# EAGLE board Module-WiFi-M0-v0.2-Board-2 (EAGLE 7.5.0)
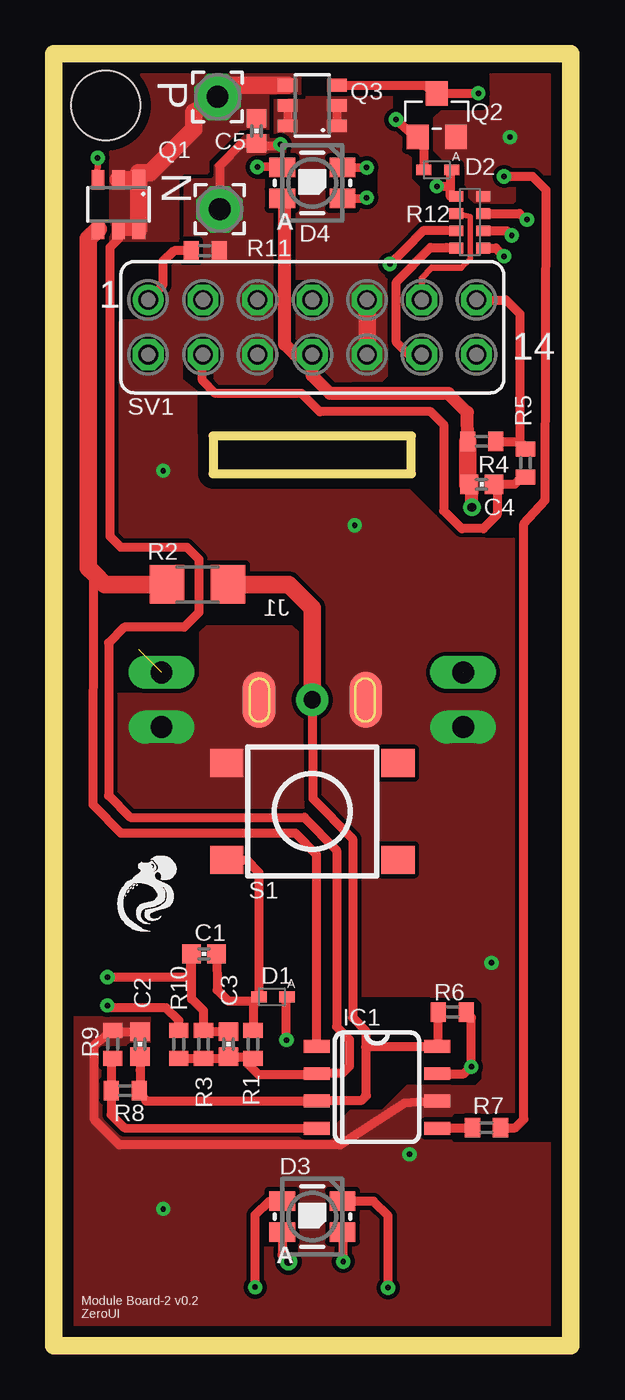
[diagram p0: board, top side]
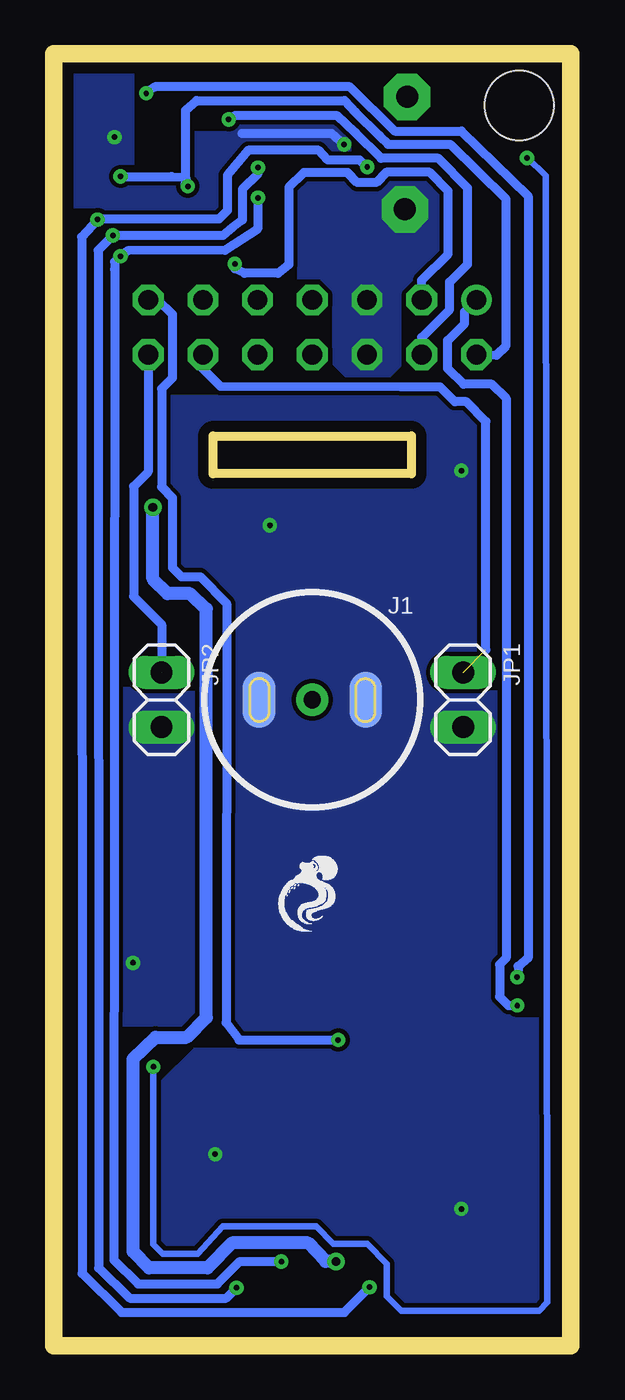
[diagram p1: board, bottom side, seen from below]

Size 24 x 60 mm. Coordinates in mm from the lower left corner, seen from the top.
Outline: 0,60 0,0 24,0 24,60 0,60
Outline: 7.4,42.25 7.4,40.5 16.6,40.5 16.6,42.25 7.4,42.25
Copper layers (1*16): Top 0.035mm / dielectric 1.5mm / Bottom 0.035mm
Design rules "default *": minimum track width 8mil, minimum drill 5mil, track to track 8mil, track to pad 8mil, pad to pad 8mil, via to via 8mil, smd to smd 8mil, copper to edge 20mil, drill to drill 8mil, minimum pad ring 10mil, minimum via ring 8mil, stop-mask expansion 4mil, vias tented up to drill 0mil, thermal gap 10mil
Holes 3.2 mm at 2.4,57.6
tRestrict: 78 lines
bRestrict: 26 lines

## Footprints (pad centres in the part's own frame; a part is rotated, then mirrored left to right if it is on the bottom)
0402-CAP = smd 0.85 x 0.9: 1 -0.58,0; 2 0.58,0
SOD523 = smd 0.7 x 0.5: A 0.7,0; C -0.6,0
LED_RGB = smd 1.2 x 0.9: 1-RED 1.4,-0.725; 2-CA -1.4,-0.725; 3-BL -1.4,0.725; 4-GR 1.4,0.725
SOIC-8-TIGHT = smd 0.6 x 1.2: 1 -1.905,-2.8; 2 -0.635,-2.8; 3 0.635,-2.8; 4 1.905,-2.8; 5 1.905,2.8; 6 0.635,2.8; 7 -0.635,2.8; 8 -1.905,2.8
CONN-MAG = smd 1.5 x 2.6 bottom: GND@1 -2.475,0; GND@4 2.475,0 | smd 1.5 x 2.6: GND@2 2.475,0; GND@3 -2.475,0 | drill 0.8 pad 1.5: POS 0,0
1X02 = drill 1.016 long: 1 -1.27,0; 2 1.27,0
2,15/1,0 = drill 1.016 pad 2.159 octagon: 1 0,0
SOT23-6 = smd 0.6 x 0.9: 1 -0.95,-1.15; 2 0,-1.15; 3 0.95,-1.15; 4 0.95,1.15; 5 0,1.15; 6 -0.95,1.15
SOT-23 = smd 1.016 x 1.143: 1 -0.889,-1.016; 2 0.889,-1.016; 3 0,1.016
R0402 = smd 0.7 x 0.9: 1 -0.65,0; 2 0.65,0
R1206 = smd 1.6 x 1.803: 1 -1.422,0; 2 1.422,0
0603-ARV = smd 0.5 x 0.65: 1 -1.2,-0.625; 2 -0.4,-0.625; 3 0.4,-0.625; 4 1.2,-0.625; 5 1.2,0.625; 6 0.4,0.625; 7 -0.4,0.625; 8 -1.2,0.625
TACTILE_SWITCH_TALL = smd 1.55 x 1.3: A1 -3.975,-2.25; A2 3.975,-2.25; B1 -3.975,2.25; B2 3.975,2.25
FE07-2 = drill 0.914: 1 -7.62,1.27 | drill 0.914 octagon: 2 -7.62,-1.27; 3 -5.08,1.27; 4 -5.08,-1.27; 5 -2.54,1.27; 6 -2.54,-1.27; 7 0,1.27; 8 0,-1.27; 9 2.54,1.27; 10 2.54,-1.27; 11 5.08,1.27; 12 5.08,-1.27; 13 7.62,1.27; 14 7.62,-1.27

## Placement (x,y rotation side)
C1  0.1uF  [0402-CAP]  6.97,18.19 180 top
C2  10uF  [0402-CAP]  4,14 90 top
C3  0.1uF  [0402-CAP]  8.1,14 90 top
C4  10uF  [0402-CAP]  19.86,40 0 top
C5  10uF  [0402-CAP]  9.42,56.41 270 top
D1  PMEG3005EB  [SOD523]  10.12,16.2 0 top
D2  PMEG3005EB  [SOD523]  17.78,54.61 0 top
D3  [LED_RGB]  12,6 0 top
D4  [LED_RGB]  12,54 0 top
IC1  BQ2057WSNTR  [SOIC-8-TIGHT]  15,12 270 top
J1  CONN-CIR_MAG  [CONN-MAG]  12,30 0 bottom
JP1  [1X02]  5,30 270 bottom
JP2  [1X02]  19,30 270 bottom
N  WIREPAD2,15/1,0  [2,15/1,0]  7.7,52.78 270 top
P  WIREPAD2,15/1,0  [2,15/1,0]  7.6,58 270 top
Q1  IRLTS2242-PMOS  [SOT23-6]  3,53 180 top
Q2  2N7002-NMOS  [SOT-23]  17.78,57.15 0 top
Q3  IRLTS2242-PMOS  [SOT23-6]  12,57.6 90 top
R1  30k  [R0402]  9.25,14 270 top
R2  0.5E, 0.5W  [R1206]  6.67,35.36 180 top
R3  300k  [R0402]  6.95,14 270 top
R4  300k  [R0402]  19.86,42 180 top
R5  300k  [R0402]  21.9,41 90 top
R6  3k  [R0402]  18.5,15.5 180 top
R7  3k  [R0402]  20.09,10.13 0 top
R8  3k  [R0402]  3.31,11.85 180 top
R9  3k  [R0402]  2.74,14 90 top
R10  30k  [R0402]  5.8,14 270 top
R11  3k  [R0402]  7.03,50.86 180 top
R12  500E  [0603-ARV]  19.31,52.18 90 top
S1  On/Off Sw  [TACTILE_SWITCH_TALL]  12,24.81 180 top
SV1  [FE07-2]  12,47.3 0 top
U$1  [OCTO_LOGO]  13.97,19.05 0 bottom
U$2  [OCTO_LOGO]  2.54,19.05 0 top

## Library data of the parts
C1-C5 = 1_ZeroUI; PROD_ID: CAP-12416
D1 D2 = diode
D3 D4 J1 Q1 Q3 U$1 U$2 = 1_ZeroUI
IC1 = 1_ZeroUI; DATASHEETURL: http://www.ti.com/lit/ds/symlink/bq2057c.pdf
JP1 JP2 = pinhead
N P = wirepad
Q2 = 1_ZeroUI; MPN: 2N7002,215
R1-R11 = rcl
R12 = SparkFun-Passives
S1 = 1_ZeroUI; PROD_ID: SWCH-11966
SV1 = con-lsta; OC_FARNELL: unknown; OC_NEWARK: unknown

## Nets
3.3V: C4.1 D3.2-CA D4.2-CA R4.2 SV1.8
12V: C2.1 IC1.3 IC1.8 J1.POS R2.1 R6.2 R8.1
CHG_ON: D2.A R7.2 R12.5 SV1.2
DTR: SV1.7
GND: C2.2 C5.2 IC1.6 J1.GND@1 J1.GND@2 J1.GND@3 J1.GND@4 JP1.2 JP2.2 N.1 Q2.2 R9.2 R11.1 R12.4 S1.A2 SV1.5 SV1.6
LED-G: R12.7 SV1.3
N$1: D3.1-RED D4.1-RED R12.1
N$2: D3.4-GR D4.4-GR R12.2
N$3: D3.3-BL D4.3-BL R12.3
N$4: C1.1 D1.C R1.1 S1.B2
N$5: C1.2 C3.2 Q2.3 Q3.3 R3.1
N$6: IC1.5 R7.1
N$10: IC1.1 Q1.4 R2.2
N$13: IC1.7 Q1.3 R6.1
PROGL/LED-B: R12.6 SV1.11
PWR_EN: C4.2 D2.C Q2.1 R5.1 SV1.4
RXD/LED-R: JP1.1 R12.8 SV1.12
SW_INT: D1.A R4.1 R5.2 SV1.13
TS1: IC1.4 R8.2 R9.1
TXD: JP2.1 SV1.14
V_BATT: C3.1 C5.1 IC1.2 P.1 Q1.1 Q1.2 Q1.5 Q1.6 Q3.4 R1.2 R3.2 R10.2
VBATT_SENSE: R10.1 R11.2 SV1.1
VDD: Q3.1 Q3.2 Q3.5 Q3.6 SV1.9 SV1.10

## Tracks (layer width: path | path; a pad name or v marks a point on that pad's centre or on a via)
3.3V  (via drill 0.41)
  Top 0.406: 11.99,46.02 SV1.8 | D4.2-CA | D3.2-CA 10.6,4.21 v10.9,3.91 | 19.41,39.99 C4.1
  Top 0.61: R4.2 19.2,43.34 18.31,44.22 12.83,44.22 11.99,45.06 11.99,46.02 | SV1.8 11.2,46.03 10.72,46.51 10.72,53.15 10.59,53.38 D4.2-CA | v19.41,38.94 19.41,39.99
  Top 0.813: R4.2 19.22,39.99 C4.1
  Bottom 0.61: v10.9,3.91 11.38,3.91 12.19,4.78 15.72,4.78 16.87,3.61 19.58,3.61 20.32,4.37 20.32,13.31 19.28,14.33 17.83,14.33 16.92,15.24 16.92,34.21 17.68,34.92 18.72,34.92 19.41,35.61 v19.41,38.94
12V
  Top 0.406: C2.1 4,12.8 4.01,12.22 R8.1 4.29,11.37 IC1.3 12.23,11.4 14.3,11.4 14.51,11.61 14.48,11.63 14.48,13.87 | R6.2 17.86,13.93 IC1.8 17.52,13.88 14.48,13.87 | J1.POS 12.03,25.41 13.87,23.55 13.87,15.24 14.48,14.63 14.48,13.87
  Top 0.813: J1.POS 12,34.25 10.9,35.36 8.25,35.36 R2.1
CHG_ON  (via drill 0.25)
  Top 0.406: R7.2 21.43,10.12 21.82,10.52 21.82,38.18 22.81,39.27 22.86,53.67 22.23,54.3 v20.9,54.3 | D2.A 18.41,54.51 18.41,54.53 18.41,53.39 R12.5 18.43,53.38 18.39,53.42 18.39,53.85 v17.78,53.85
  Bottom 0.406: v20.9,54.3 18.54,54.3 17.91,54.28 v17.78,53.85 17.91,53.81 17.89,54.26 17.89,57.38 17.38,57.83 10.5,57.83 10,57.3 8.88,56.2 8.48,55.8 5.6,55.8 3,53.25 3,46.46 3.45,46.01 SV1.2
GND  (via drill 0.25)
  Top 0.406: C2.2 2.76,14.58 R9.2 1.88,13.97 1.88,10.49 3.05,9.32 13.3,9.32 16.28,11.26 IC1.6 | Q2.2 18.67,55.85 | N.1 7.7,54.8 8.71,55.83 C5.2 9.73,55.73 10.51,55.73 v10.52,55.79
  Bottom 0.406: v10.52,55.79 11.1,56.3 15.27,56.3
  other vias: 5.08,6.35 16.51,8.89 20.32,17.78 5.08,40.64 13.97,38.1 21.18,56.13
  pour Top (rank 6, no thermals): -20,73.54 -20,-13.54 40,-13.54 40,73.54
  pour Bottom (rank 6, no thermals): -35.24,71 -35.24,-11 62.86,-11 62.86,71
LED-G  (via drill 0.25)
  Top 0.406: v15.6,50.24 16.28,50.9 17.18,51.8 18.24,51.8 R12.7
  Bottom 0.406: SV1.3 6.92,49.48 5.7,50.7 5.7,53.62 6.55,54.5 8.57,54.5 9.04,54.03 9.91,54.03 10.36,54.48 12.39,54.48 13.09,53.8 13.09,50.21 13.59,49.81 15.14,49.81 15.6,50.01 v15.6,50.24
N$1  (via drill 0.25)
  Top 0.406: R12.1 20.52,50.98 v20.9,50.6 | v13.44,3.91 13.44,5.24 D3.1-RED | D4.1-RED 14.55,53.29 v14.52,53.32
  Bottom 0.406: v13.44,3.91 15.37,3.91 16.41,2.87 20.09,2.87 21.21,3.99 21.18,49.99 21.18,50.34 v20.9,50.6 20.57,50.85 16.05,50.88 14.54,51.86 14.54,53.25 v14.52,53.32
N$2  (via drill 0.25)
  Top 0.406: R12.2 21.04,51.78 v21.26,51.56 | v15.52,2.69 15.52,6.02 14.83,6.71 13.42,6.71 D3.4-GR | D4.4-GR 14.65,54.72 v14.52,54.72
  Bottom 0.406: v15.52,2.69 16,2.21 20.47,2.21 21.92,3.61 21.95,50.88 v21.26,51.56 16.15,51.56 15.72,51.92 15.25,52.28 15.24,53.02 15.24,53.71 14.52,54.44 v14.52,54.72
N$3  (via drill 0.25)
  Top 0.406: R12.3 21.61,52.58 v21.97,52.3 | v9.35,2.72 9.35,6.07 10,6.7 D3.3-BL | D4.3-BL 10.66,54.77 v9.45,54.74
  Bottom 0.406: v9.35,2.72 10.52,1.55 20.85,1.55 22.68,3.35 22.71,51.49 v21.97,52.3 21.85,52.32 16.34,52.32 15.94,52.72 15.94,54.35 14.98,55.52 11.71,55.52 11.28,55.07 9.8,55.07 v9.45,54.74
N$4
  Top 0.406: C1.1 7.58,16.52 8.1,16.01 9.25,16.01 9.25,16 | 9.25,16 R1.1 9.05,14.7 | 9.25,16 D1.C | S1.B2 8.96,22.56 9.52,21.97 D1.C | 9.5,16.22 D1.C
N$5  (via drill 0.25)
  Top 0.406: C3.2 7.07,14.58 R3.1 6.95,15.55 6.4,16.1 6.4,16.98 C1.2 6.3,17.12 v2.49,17.12 | Q3.3 13.37,58.53 17.22,58.53 Q2.3 v19.71,58.17
  Bottom 0.406: v2.49,17.12 2.46,17.14 2.44,17.62 1.98,18 1.98,53.39 5.08,56.41 8.18,56.41 10.26,58.47 19.3,58.47 v19.71,58.17
N$6
  Top 0.406: R7.1 19.46,10.1 IC1.5
N$10
  Top 0.406: IC1.1 12.2,22.8 11.23,23.8 3.12,23.8 1.83,25.12 1.84,35.88 | 5.16,35.38 5.41,35.35 R2.2
  Top 0.813: R2.2 2.36,35.36 1.84,35.88 1.61,36.12 1.61,51.41 Q1.4
N$13  (via drill 0.25)
  Top 0.305: v2.03,55.17 2.02,54.18 Q1.3
  Top 0.406: IC1.7 19.04,12.63 v19.38,12.95 19.38,15.24 R6.1
  Bottom 0.305: v19.38,12.95 19.38,4.7 18.95,4.27 17.32,4.27 16.15,5.54 11.81,5.54 11.02,4.72 9.45,4.72 8.53,3.81 8.53,2.29 7.87,1.63 1.47,1.63 1.09,2.01 1.17,54.33 v2.03,55.17
PROGL/LED-B
  Top 0.254: 18.77,52.58 19.33,52.43 19.33,50.47 18.92,50.06
  Top 0.305: SV1.11 17.08,49.59 17.55,50.06 18.92,50.06 | 18.77,52.58 18.74,52.58 18.71,52.58
  Top 0.406: 18.71,52.58 R12.6 18.74,52.58
PWR_EN  (via drill 0.25)
  Top 0.406: R5.1 21.73,40.35 21.39,40.01 20.59,40.01 | 20.59,40.01 C4.2 | Q2.1 16.89,56.31 | Q2.1 17.17,55.93 D2.C | 20.59,40.01 20.59,38.59 19.94,37.95 18.95,37.95 18.1,38.78 18.1,42.78 17.5,43.38 12.35,43.38 11.51,44.22 7.5,44.22 6.9,44.84 SV1.4 | v15.88,56.95 16.96,56 Q2.1
  Bottom 0.406: SV1.4 6.92,46.83 5.62,48.12 5.62,49.4 4.79,50.23 4.79,53.77 6.15,55.15 8.8,55.15 9.99,56.34 10.83,57.12 15.62,57.12 v15.88,56.95
RXD/LED-R  (1 unrouted)
  Top 0.406: SV1.12 16.47,46.03 15.9,46.6 15.9,49.39 17.49,51 18.24,51 R12.8
  Bottom 0.406: 3.94,32.33 3.94,42.93 4.85,43.84 5.38,43.84 6.07,44.53 7.87,44.53 16.26,44.55 17.22,45.52 17.17,45.92 17.13,46.12 SV1.12
SW_INT  (via drill 0.25)
  Top 0.406: R4.1 21.65,42 | 21.65,42 R5.2 | SV1.13 21,48.57 21.64,47.93 21.64,42.01 21.65,42 | v10.8,14.2 10.8,16.18 D1.A
  Bottom 0.406: SV1.13 19.17,48.57 18.5,47.9 18.5,44.95 19,44.45 19,39.88 18.49,39.37 18.5,36.13 18.08,35.71 17.21,35.71 15.97,34.48 16,15 15.4,14.2 v10.8,14.2
TS1
  Top 0.406: IC1.4 3.27,10.12 2.66,10.73 R8.2 2.66,13.3 R9.1
TXD  (1 unrouted)
  Bottom 0.406: SV1.14 19.62,40.58 20.3,39.9 20.3,34.8 19,33.5 JP2.1
V_BATT
  Top 0.406: 5.93,13.42 R10.2 R3.2 7.93,13.35 C3.1 8.93,13.42 R1.2 9,13.1 9.5,12.6 12.16,12.6 IC1.2 12.21,12.65 13.39,12.65 13.72,12.98 13.72,14.22 13.13,14.81 13.13,23.01 11.63,24.54 3.56,24.54 2.54,25.55 2.54,32.64 3.28,33.38 6.04,33.38 6.73,34.06 6.73,36.52 6.17,37.08 3.11,37.08 2.6,37.59 2.6,51 3,51.4 Q1.5 | 7.56,57.84 P.1
  Top 0.61: Q1.5 Q1.6
  Top 0.813: Q1.6 Q1.1 | Q1.1 Q1.2 | Q1.1 3.95,54.47 4.47,54.47 6.5,56.5 6.5,57.3 P.1 8.05,58.55 Q3.4
  pour Top (no thermals): -1.05,62.85 11.43,62.85 11.43,58.14 9.95,58.14 9.95,54.31 5.95,54.31 5.95,51.31 -1.05,51.31
VBATT_SENSE  (via drill 0.25)
  Top 0.406: R11.2 5.59,50.86 5.05,50.34 5.05,49.24 SV1.1 | R10.1 5.8,15.1 5.2,15.7 2.58,15.7 v2.48,15.8
  Bottom 0.406: v2.48,15.8 2.9,15.8 3.3,16.2 3.3,17.7 3,18 3,44 3.66,44.65 4.98,44.65 5.71,45.39 5.71,46.69 4.93,47.47 4.93,48.02 SV1.1
VDD
  Top 0.406: Q3.5 Q3.6 | Q3.1 Q3.2
  Top 0.813: SV1.10 SV1.9
  pour Top (rank 2, no thermals): 10.16,55.98 10.9,55.75 10.95,44.09 17.07,44.04 17.04,57.99 10.19,58.01

## Text on the board
tPlace: Module Board-2 v0.2 / ZeroUI
Reference: BOTTOM PCB